# Altium PCB DS165-1.1-B铵根离子传感器.PcbDoc
Units mil, origin at the board's own origin, x right, y up, seen from the top; angles counter-clockwise.
Board outline 1614.17 x 2519.69 mil, 2 copper layers (Top Layer, Bottom Layer); 36 components, 39 nets, 118 pads, 82 vias.
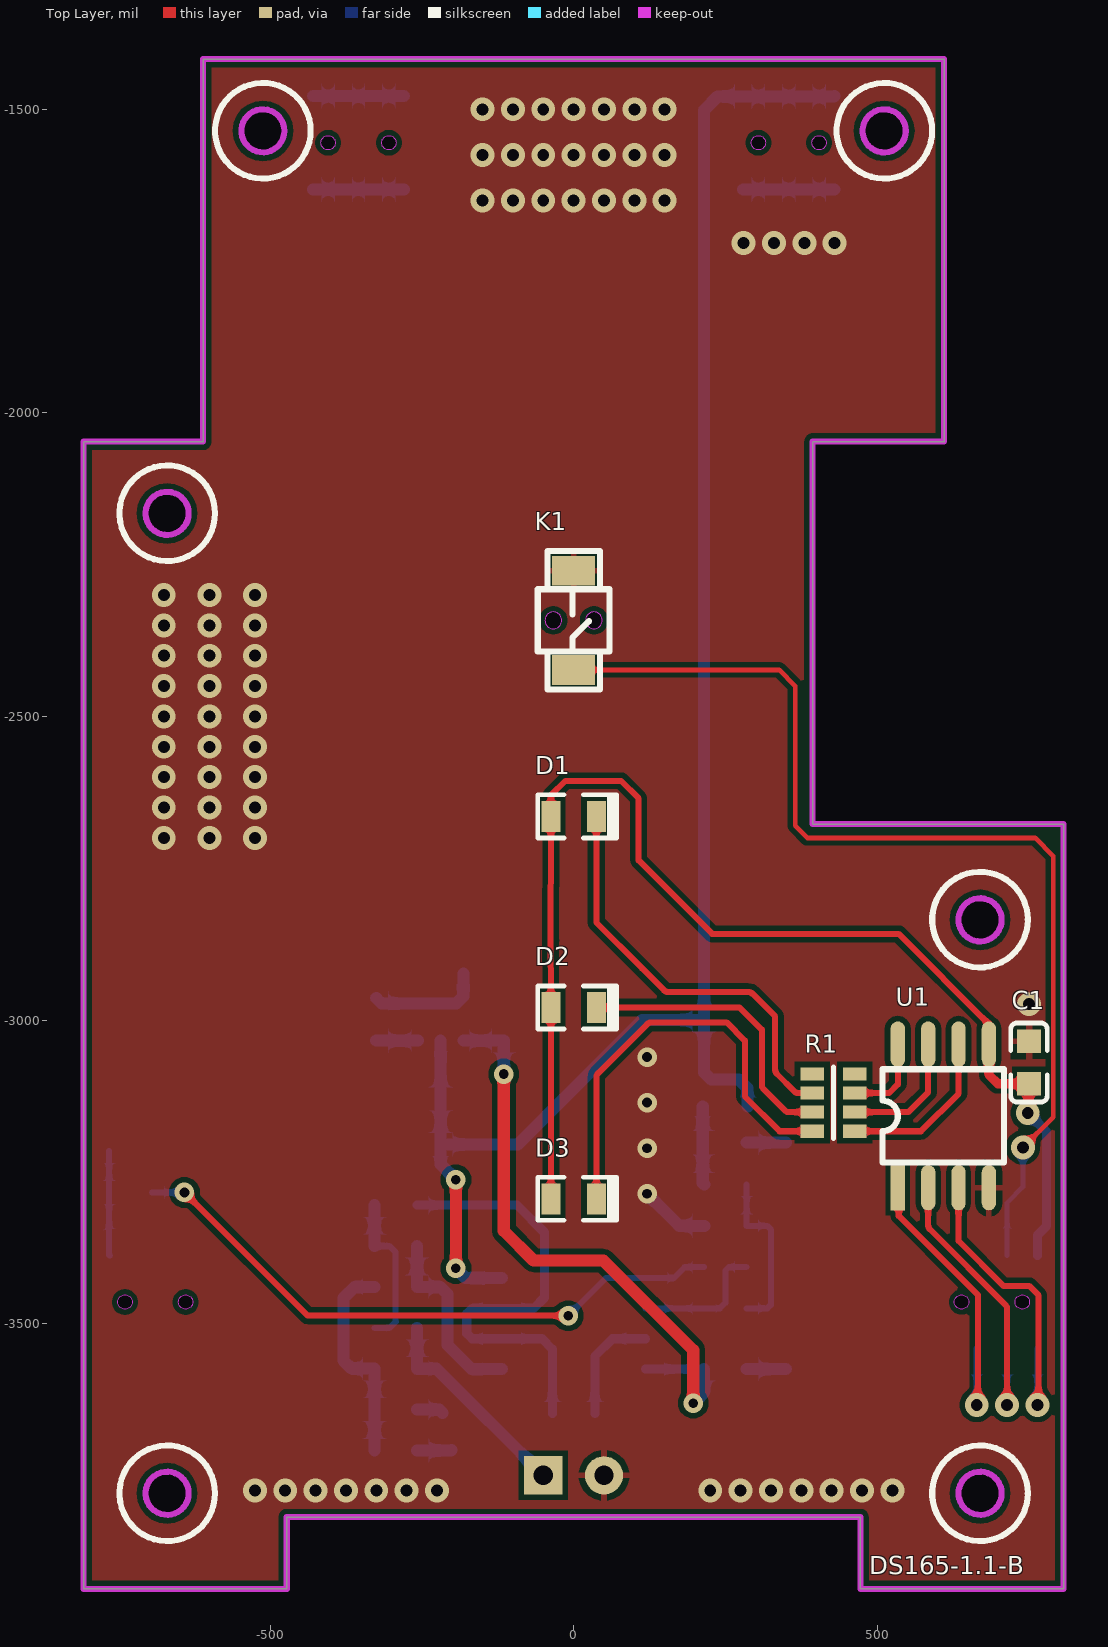
[diagram p0: Top Layer view]
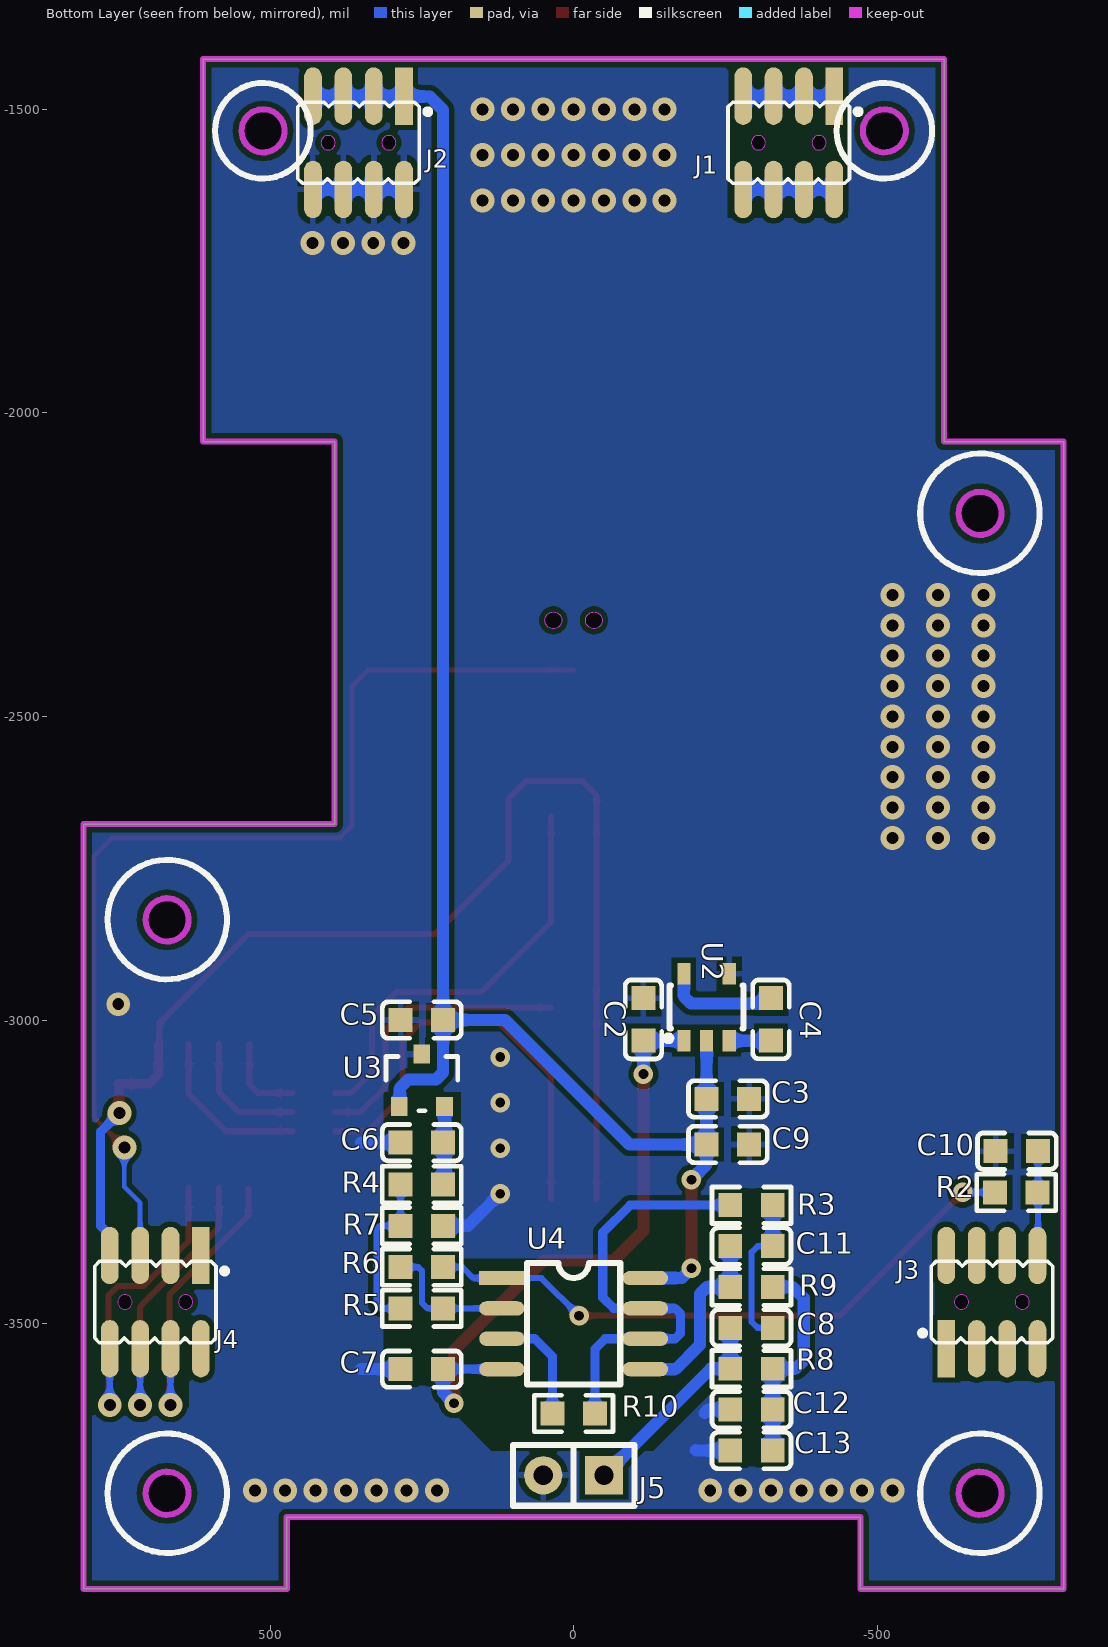
[diagram p1: Bottom Layer view, seen from below]
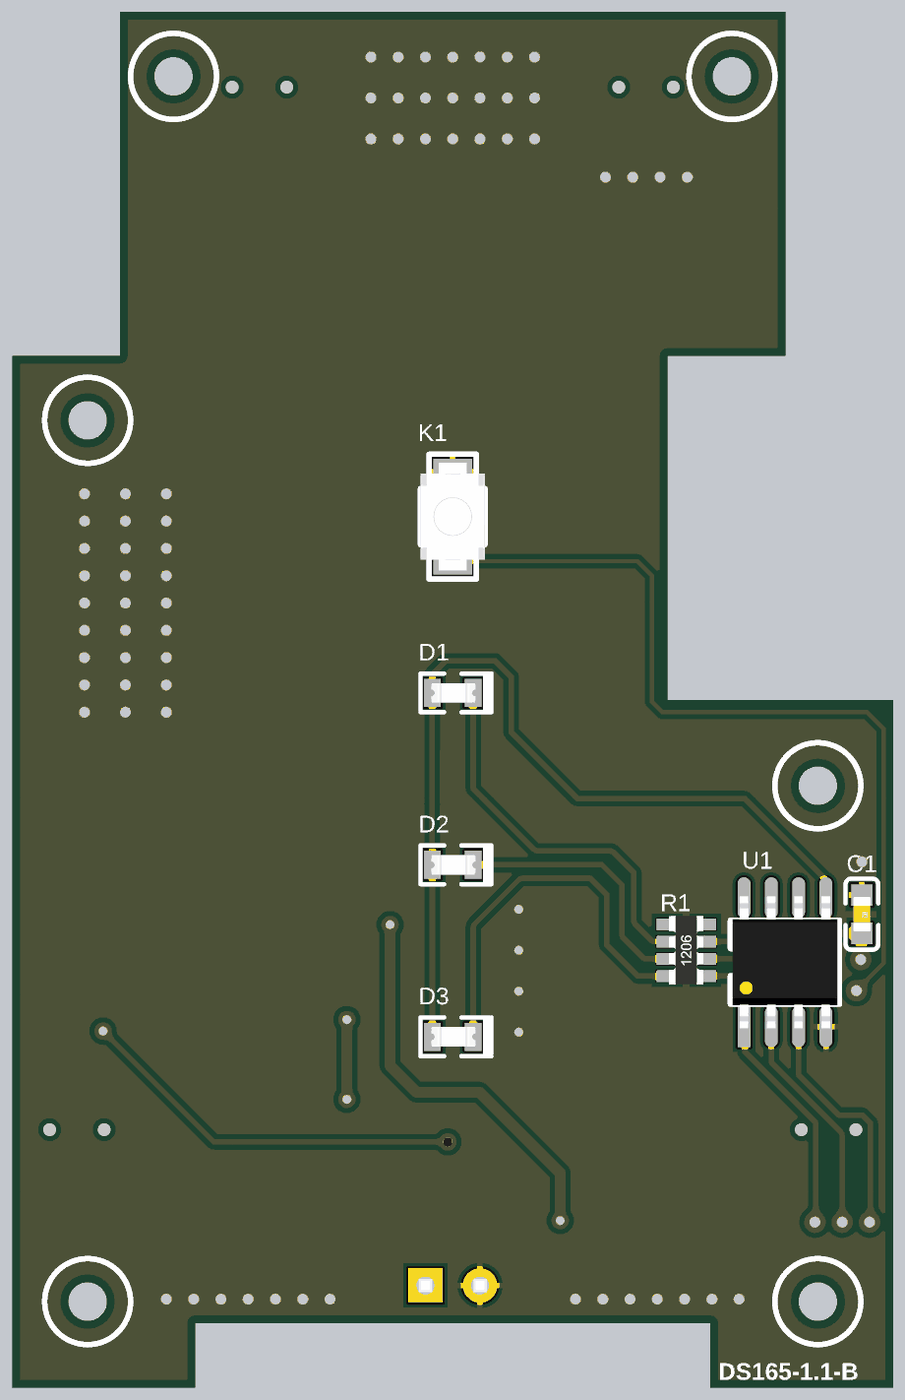
[diagram p2: 3D render of the assembled board from above, using the file's embedded part models]
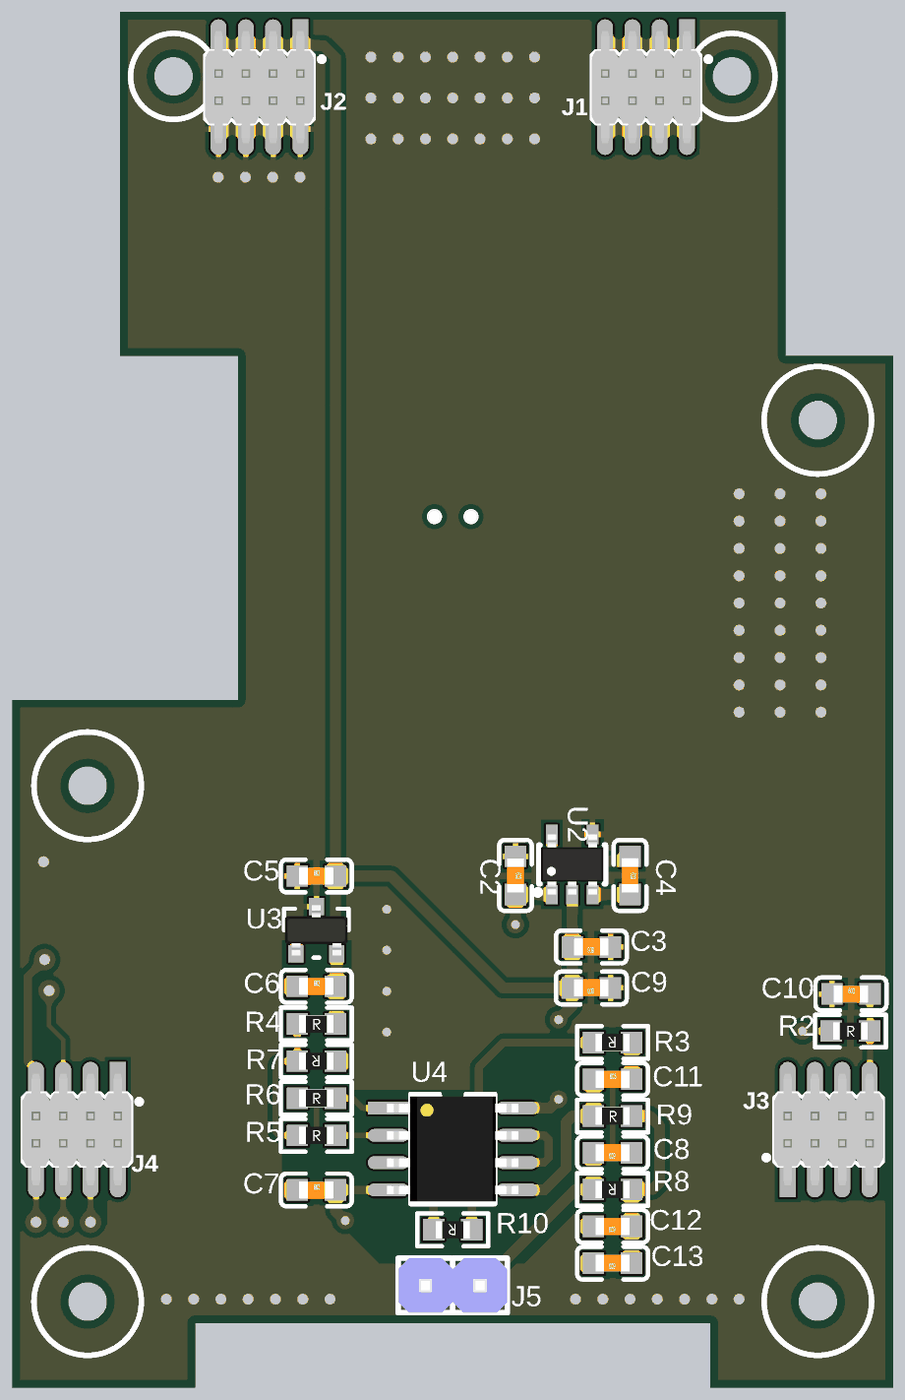
[diagram p3: 3D render of the assembled board from below, using the file's embedded part models]

## Layer stack, top to bottom
Top Solder: solder mask 0.4, Solder Resist, Dk 3.5
Top Layer: signal copper 1.4
Dielectric 1: dielectric 12.6, FR-4, Dk 4.8
Bottom Layer: signal copper 1.4
Bottom Solder: solder mask 0.4, Solder Resist, Dk 3.5

## Board outline
-807.09,-3937.01 -807.09,-2047.24 -610.24,-2047.24 -610.24,-1417.32 610.24,-1417.32 610.24,-2047.24 393.7,-2047.24 393.7,-2677.17 807.09,-2677.17 807.09,-3937.01 472.44,-3937.01 472.44,-3818.9 -472.44,-3818.9 -472.44,-3937.01
cut-out: -704.72,-3779.53 ccw(c-669.29,-3779.53) -669.29,-3814.96 ccw(c-669.29,-3779.53) -633.86,-3779.53 ccw(c-669.29,-3779.53) -669.29,-3744.09 ccw(c-669.29,-3779.53)
cut-out: 633.86,-3779.53 ccw(c669.29,-3779.53) 669.29,-3814.96 ccw(c669.29,-3779.53) 704.72,-3779.53 ccw(c669.29,-3779.53) 669.29,-3744.09 ccw(c669.29,-3779.53)
cut-out: 633.86,-2834.65 ccw(c669.29,-2834.65) 669.29,-2870.08 ccw(c669.29,-2834.65) 704.72,-2834.65 ccw(c669.29,-2834.65) 669.29,-2799.21 ccw(c669.29,-2834.65)
cut-out: -704.72,-2165.35 ccw(c-669.29,-2165.35) -669.29,-2200.79 ccw(c-669.29,-2165.35) -633.86,-2165.35 ccw(c-669.29,-2165.35) -669.29,-2129.92 ccw(c-669.29,-2165.35)
cut-out: 476.38,-1535.43 ccw(c511.81,-1535.43) 511.81,-1570.87 ccw(c511.81,-1535.43) 547.24,-1535.43 ccw(c511.81,-1535.43) 511.81,-1500 ccw(c511.81,-1535.43)
cut-out: -547.24,-1535.43 ccw(c-511.81,-1535.43) -511.81,-1570.87 ccw(c-511.81,-1535.43) -476.38,-1535.43 ccw(c-511.81,-1535.43) -511.81,-1500 ccw(c-511.81,-1535.43)
cut-out: -704.72,-3779.53 ccw(c-669.29,-3779.53) -669.29,-3814.96 ccw(c-669.29,-3779.53) -633.86,-3779.53 ccw(c-669.29,-3779.53) -669.29,-3744.09 ccw(c-669.29,-3779.53)
cut-out: 633.86,-3779.53 ccw(c669.29,-3779.53) 669.29,-3814.96 ccw(c669.29,-3779.53) 704.72,-3779.53 ccw(c669.29,-3779.53) 669.29,-3744.09 ccw(c669.29,-3779.53)
cut-out: 633.86,-2834.65 ccw(c669.29,-2834.65) 669.29,-2870.08 ccw(c669.29,-2834.65) 704.72,-2834.65 ccw(c669.29,-2834.65) 669.29,-2799.21 ccw(c669.29,-2834.65)
cut-out: -704.72,-2165.35 ccw(c-669.29,-2165.35) -669.29,-2200.79 ccw(c-669.29,-2165.35) -633.86,-2165.35 ccw(c-669.29,-2165.35) -669.29,-2129.92 ccw(c-669.29,-2165.35)
cut-out: 476.38,-1535.43 ccw(c511.81,-1535.43) 511.81,-1570.87 ccw(c511.81,-1535.43) 547.24,-1535.43 ccw(c511.81,-1535.43) 511.81,-1500 ccw(c511.81,-1535.43)
cut-out: -547.24,-1535.43 ccw(c-511.81,-1535.43) -511.81,-1570.87 ccw(c-511.81,-1535.43) -476.38,-1535.43 ccw(c-511.81,-1535.43) -511.81,-1500 ccw(c-511.81,-1535.43)

## Design rules (kind name [scope] priority, off if disabled: settings)
Clearance [All] p1: gap=6 ignorepadtopadclearanceinfootprint=TRUE except(9: Arc-Fill Arc-Poly Arc-Region Track-Fill Track-Poly Track-Region SMDPad-Fill SMDPad-Poly SMDPad-Region THPad-Fill THPad-Poly THPad-Region Via-Fill Via-Poly Via-Region Fill-Fill Fill-Poly Fill-Region Poly-Poly Poly-Region Region-Region)
PolygonConnect [All] p1: thpad.connectstyle=Relief thpad.reliefconductorwidth=10 thpad.reliefentries=4 thpad.polygonreliefangle="90 Angle" thpad.airgapwidth=10 smdpad.connectstyle=Relief smdpad.reliefconductorwidth=10 smdpad.reliefentries=4 smdpad.polygonreliefangle="90 Angle" smdpad.airgapwidth=10 via.connectstyle=Direct via.reliefconductorwidth=10 via.reliefentries=4 via.polygonreliefangle="90 Angle" via.airgapwidth=10
RoutingVias [All] p1: holewidth=16 width=32 viastyle="Through Hole" minholewidth=16 minwidth=32 maxholewidth=28 maxwidth=50
SolderMaskExpansion [All] p1: expansion=4 istentingtop=FALSE
Width [All] p1: maxlimit=20 minlimit=6 preferedwidth=10
30 further rules are at their usual default settings.

## Components (designator, comment, footprint, x,y, rotation, side; value= is the part's Value field where it differs from the comment)
C1 "SMDCAP00013" 0603CAP 750,-3070 r270 top value=100nF
C2 "MLCC 3.3uF 50V ±10％ 0603" 0603CAP -115,-2999 r270 bottom value=3.3uF
C3 "MLCC 3.3uF 50V ±10％ 0603" 0603CAP -254.04,-3130 r0 bottom value=3.3uF
C4 "MLCC 3.3uF 50V ±10％ 0603" 0603CAP -325,-2998.96 r270 bottom value=3.3uF
C5 "MLCC 100nF 50V ±10％ 0603" 0603CAP 250.04,-3000 r180 bottom value=100nF
C6 "MLCC 100nF 50V ±10％ 0603" 0603CAP 250.04,-3202 r180 bottom value=100nF
C7 "MLCC 100nF 50V ±10％ 0603" 0603CAP 250.04,-3575 r180 bottom value=100nF
C8 "MLCC 100nF 50V ±10％ 0603" 0603CAP -293,-3507 r0 bottom value=100nF
C9 "MLCC 100nF 50V ±10％ 0603" 0603CAP -254.04,-3205 r0 bottom value=100nF
C10 "MLCC 100nF 50V ±10％ 0603" 0603CAP -730,-3216 r180 bottom value=100nF
C11 "MLCC 100nF 50V ±10％ 0603" 0603CAP -293,-3372.33 r180 bottom value=100nF
C12 "MLCC 100nF 50V ±10％ 0603" 0603CAP -293,-3641.67 r0 bottom value=100nF
C13 "MLCC 100nF 50V ±10％ 0603" 0603CAP -293,-3709 r0 bottom value=100nF
D1 "SMDLED00010" LED_0805 0,-2664.57 r0 top value=BLUE
D2 "SMDLED00003" LED_0805 0,-2979.53 r0 top value=RED
D3 "Chip 翠绿LED 0805" LED_0805 0,-3294.49 r0 top value=GREEN
J1 "X1321WVS-2x04J-C40D53" X1321WVS-2X04J-C40D53 -354.33,-1555.12 r0 bottom locked value=2*4P
J2 "X1321WVS-2x04J-C40D53" X1321WVS-2X04J-C40D53 354.33,-1555.12 r0 bottom locked value=2*4P
J3 "X1321WVS-2x04J-C40D53" X1321WVS-2X04J-C40D53 -688.98,-3464.57 r180 bottom locked value=2*4P
J4 "X1321WVS-2x04J-C40D53" X1321WVS-2X04J-C40D53 688.98,-3464.57 r0 bottom locked value=2*4P
J5 "SL000000042" SIP2 0,-3750 r0 bottom value=探头
K1 "TS-1185-B-A-A-A" KEY_TS-1185-x-A-A-A 0,-2341.73 r270 top
R1 "SMDRES05003" 0603RES_Pack4 428,-3136 r180 top value=510R
R2 "SMDRES00015" 0603RES -729,-3284 r180 bottom value=100R
R3 "Chip 16K 1/16W ±1％ 0603" 0603RES -293,-3305 r0 bottom value=16K
R4 "Chip 1K 1/10W ±0.1％ 0603" 0603RES 250.04,-3271 r180 bottom value="1K ±0.1%"
R5 "Chip 10K 1/10W ±0.1％ 0603" 0603RES 250.04,-3475 r180 bottom value="10K ±0.1%"
R6 "Chip 50K 1/10W ±0.1％ 0603" 0603RES 250.04,-3407 r180 bottom value="50K ±0.1%"
R7 "SMDRES00015" 0603RES 250.04,-3339 r0 bottom value=100R
R8 "Chip 16K 1/16W ±1％ 0603" 0603RES -293,-3574.33 r0 bottom value=16K
R9 "Chip 16K 1/16W ±1％ 0603" 0603RES -293,-3439.67 r180 bottom value=16K
R10 "Chip 10K 1/10W ±0.1％ 0603" 0603RES 0,-3648 r0 bottom value="10K ±0.1%"
U1 "SMDIC000018" SO-8 609,-3157.89 r90 top value=ULN2001
U2 "SGM3206" SOT23-5 -219,-2978.88 r180 bottom value=丝印SL7NL
U3 "REF3025" SOT23 250,-3099.31 r180 bottom value=丝印R30C
U4 "OPA2188" SO-8 0,-3500 r180 bottom

## Footprints (in the part's own frame and the unit in brackets; to place one, negate y for a bottom-side part, rotate by r counter-clockwise, add the part's x,y. Pads: shape width x height; smd on the part's side, far side on the other; paste and mask are expansions set on the pad)
0603CAP [mm]
  rect 1x1 smd: 1(-0.889,0) 2(0.89,0)
  silkscreen extent -1.65,-0.76 1.65,0.76, body extent -0.8,-0.4 0.8,0.4, height 0.3
0603RES [mm]
  rect 1x1 smd: 1(-0.889,0) 2(0.889,0)
  silkscreen extent -1.65,-0.76 1.65,0.76, body extent -0.8,-0.41 0.8,0.41, height 0.51
0603RES_Pack4 [mm]
  rect 1x0.55 smd mask+0.05: 1(-0.889,1.2) 2(-0.889,0.4) 3(-0.889,-0.4) 4(-0.889,-1.2) 5(0.889,-1.2) 6(0.889,-0.4) 7(0.889,0.4) 8(0.889,1.2)
  silkscreen extent 0,-1.5 0,1.5, body extent -0.8,-1.6 0.8,1.6, height 0.5
KEY_TS-1185-x-A-A-A [mm]
  rect 1.25x1.8 smd: 1(-2.075,0) 2(2.075,0)
  Keep-Out Layer board cut-out: 0.35,-0.85 0.323,-0.716 0.247,-0.603 0.134,-0.527 0,-0.5 0,-0.5 -0.134,-0.527 -0.247,-0.603 -0.323,-0.716 -0.35,-0.85 -0.35,-0.85 -0.323,-0.984 -0.247,-1.097 -0.134,-1.173 0,-1.2 0,-1.2 0.134,-1.173 0.247,-1.097 0.323,-0.984 0.35,-0.85
  Keep-Out Layer board cut-out: -0.35,0.85 -0.323,0.716 -0.247,0.603 -0.134,0.527 0,0.5 0,0.5 0.134,0.527 0.247,0.603 0.323,0.716 0.35,0.85 0.35,0.85 0.323,0.984 0.247,1.097 0.134,1.173 0,1.2 0,1.2 -0.134,1.173 -0.247,1.097 -0.323,0.984 -0.35,0.85
  silkscreen extent -2.9,-1.5 2.9,1.5, body extent -2.5,-1.5 2.5,1.5, height 2
LED_0805 [mm]
  rect 0.8x1.3 smd: 1(-0.95,0) 2(0.95,0)
  silkscreen extent -1.5,-0.9 1.8,0.9, body extent -1,-0.45 1.06,0.45, height 0.85
SIP2 [mm]
  rect 1.6x1.6 hole 0.813: 1(-1.27,0)
  round 1.6 hole 0.813: 2(1.27,0)
  silkscreen extent -2.54,-1.27 2.54,1.27, body extent -2.54,-1.27 2.54,1.27, height 8.64
SO-8 [mm]
  rect 1.9x0.6 smd: 1(-3,1.905)
  oval 1.9x0.6 smd: 2(-3,0.635) 3(-3,-0.635) 4(-3,-1.905) 5(3,-1.905) 6(3,-0.635) 7(3,0.635) 8(3,1.905)
  silkscreen extent -1.95,-2.54 1.95,2.54, body extent -3.07,-2.44 3.07,2.44, height 1.77
SOT23 [mm]
  rect 0.7x0.8 smd: 1(-0.95,-1.1) 2(0.95,-1.1) 3(0,1.1)
  silkscreen extent -1.5,-1.27 1.5,1, body extent -1.46,-1.17 1.46,1.17, height 1
SOT23-5 [mm] "SOT-23/SC-74A; 5 Leads; Body 3.1 x 3 mm, inc. leads (LxW max)"
  rect 0.55x0.9 smd: 1(-0.95,-1.4) 2(0,-1.4) 3(0.95,-1.4) 4(0.95,1.4) 5(-0.95,1.4)
  silkscreen extent -1.7,-1.4 1.55,0.9, body extent -1.45,-1.4 1.45,1.4, height 1.45
X1321WVS-2X04J-C40D53 [mm]
  rect 0.74x2.4 smd: 1(-1.905,-1.95)
  oval 0.74x2.4 smd: 2(-1.905,1.95) 3(-0.635,-1.95) 4(-0.635,1.95) 5(0.635,-1.95) 6(0.635,1.95) 7(1.905,-1.95) 8(1.905,1.95)
  Keep-Out Layer board cut-out: -1.57,0 -1.547,-0.115 -1.482,-0.212 -1.385,-0.277 -1.27,-0.3 -1.27,-0.3 -1.155,-0.277 -1.058,-0.212 -0.993,-0.115 -0.97,0 -0.97,0 -0.993,0.115 -1.058,0.212 -1.155,0.277 -1.27,0.3 -1.27,0.3 -1.385,0.277 -1.482,0.212 -1.547,0.115 -1.57,0
  Keep-Out Layer board cut-out: 1.57,0 1.547,0.115 1.482,0.212 1.385,0.277 1.27,0.3 1.27,0.3 1.155,0.277 1.058,0.212 0.993,0.115 0.97,0 0.97,0 0.993,-0.115 1.058,-0.212 1.155,-0.277 1.27,-0.3 1.27,-0.3 1.385,-0.277 1.482,-0.212 1.547,-0.115 1.57,0
  silkscreen extent -3,-1.7 2.54,1.7, body extent -2.54,-2.6 2.54,2.6, height 5.5

## Part data
C1: library part "MLCC 100nF 50V ±10％ 0603", "贴片电容"
C2 C3 C4 C5 C6 C7 C8 C9 C10 C11 C12 C13: "贴片电容"
D1: library part "Chip 蓝色LED 0805", "贴片LED"
D2: library part "Chip 红色LED 0805", "贴片LED"
D3: "贴片LED"
J1 J2 J3 J4: "双排针2x4P 立贴 1.27mm"
J5: library part "DIP2 单排直针 1*40P 间距2.54mm 针长11mm 铜", "单排直针"
K1: "轻触开关"
R1: library part "Chip R*4 510R 1/16W ±5％ 0603", "贴片排阻"
R2 R7: library part "Chip 100R 1/16W ±1％ 0603", "贴片电阻"
R3 R8 R9: "贴片电阻"
U1: library part "ULN2001 SOP-8", "电机驱动芯片"
U2: "SGMICRO(圣邦微) / SGM3206YN5G/TR / SOT-23-5"
U3: "TI / REF3025AIDBZR / SOT-23"
U4: "精密运放"

## Via types
v1: diameter 39.37, hole 19.68, Top Layer to Bottom Layer, tented both sides, 72 vias
v2: diameter 32, hole 16, Top Layer to Bottom Layer, tented both sides, 10 vias

## Nets (pads, with @x,y where several pads share a name; then routed paths per layer and width w, separated by ;. In a path a pad name is that pad's centre, name@x,y a point inside that pad or via, vN(x,y) a via of type N, cw(c..) or ccw(c..) an arc to the next point about the centre after c; other vN are vias at no path point)
ADC0: C10.2 J3.8 R2.2 | length 172.2
  Bottom Layer w10: C10.2 -765.04,-3386.73 J3.8
ADC1: J4.2
DAC_OUT: J3.6
Dis_blue_EN: J4.4 U1.1 | length 503.8
  Top Layer w10: U1.1@535.54,-3277.54 535.54,-3322.54 665.79,-3452.79 665.79,-3632.17 v1(663.98,-3633.98)
  Bottom Layer w10: v1(663.98,-3633.98) J4.4
Dis_green_EN: J4.8 U1.3 | length 530.7
  Top Layer w10: U1.3 634,-3364 707.76,-3437.76 750.08,-3437.76 765.79,-3453.46 765.79,-3632.17 v1(763.98,-3633.98)
  Bottom Layer w10: v1(763.98,-3633.98) J4.8
Dis_red_EN: J4.6 U1.2 | length 503.6
  Top Layer w10: U1.2 584,-3337.86 ccw(c594,-3337.86) 586.93,-3344.93 711.05,-3469.05 cw(c703.98,-3476.12) 713.98,-3476.12 v1(713.98,-3633.98)
  Bottom Layer w10: v1(713.98,-3633.98) J4.6
GND: C1.1 C2.1 C3.1 C5.1 C6.1 C7.1 C9.1 C10.1 C12.2 C13.2 J2.2 J2.4 J2.6 J2.8 J5.2 K1.1 R7.1 U1.4 U2.4 U3.3 | length 497.5
  Bottom Layer w20: C13.2 -202,-3709 -201,-3708 ; C12.2 -221.33,-3641.67 -216,-3647 ; v2(121,-3286) 174,-3339 R7.1 ; J2.2 J2.4 J2.6 J2.8 ; C7.1 350,-3575 ; C6.1 350,-3202
  other v1: -525,-3775 -475,-3775 -425,-3775 -375,-3775 -325,-3775 -275,-3775 -225,-3775 225,-3775 275,-3775 325,-3775 375,-3775 425,-3775 475,-3775 525,-3775 750,-2974 -675,-2700 -600,-2700 -525,-2700 -675,-2650 -600,-2650 -525,-2650 -675,-2600 -600,-2600 -525,-2600 -675,-2550 -600,-2550 -525,-2550 -675,-2500 -600,-2500 -525,-2500 -675,-2450 -600,-2450 -525,-2450 -675,-2400 -600,-2400 -525,-2400 -675,-2350 -600,-2350 -525,-2350 -675,-2300 -600,-2300 -525,-2300 280,-1720 330,-1720 380,-1720 430,-1720 -150,-1650 -100,-1650 -50,-1650 0,-1650 50,-1650 100,-1650 150,-1650 -150,-1575 -100,-1575 -50,-1575 0,-1575 50,-1575 100,-1575 150,-1575 -150,-1500 -100,-1500 -50,-1500 0,-1500 50,-1500 100,-1500 150,-1500
  other v2: 121,-3211 121,-3136 121,-3061
I2C1_SCL: J4.1
I2C1_SDA: J4.3
KEY_HOME: J4.5 K1.2 | length 1741
  Top Layer w7.87: K1.2 338.43,-2423.43 365,-2450 365,-2680 385,-2700 760,-2700 790,-2730 790,-3160 v1(740,-3210)
  Bottom Layer w7.87: J4.5 713.98,-3301.02 740,-3275 v1(740,-3210)
LED_blue: D1.2 R1.6 | length 698.9
  Top Layer w10: D1.2 37.4,-2839.4 113,-2915 149.07,-2951.07 ccw(c156.14,-2944) 156.14,-2954 287.86,-2954 cw(c287.86,-2964) 294.93,-2956.93 332,-2994 332,-3081.86 ccw(c342,-3081.86) 334.93,-3088.93 363.36,-3117.36 ccw(c370.39,-3110.25) 370.35,-3120.25 R1.6
LED_green: D3.2 R1.8 | length 722.6
  Top Layer w10: D3.2 37.4,-3094.7 cw(c47.4,-3094.74) 40.3,-3087.7 121.09,-3006.91 cw(c128.14,-3014) 128.14,-3004 252,-3004 282,-3034 282,-3126 339.24,-3183.24 R1.8
LED_red: D2.2 R1.7 | length 481.7
  Top Layer w10: D2.2 273.53,-2979.53 310,-3016 310,-3106.86 ccw(c320,-3106.86) 312.93,-3113.93 347.85,-3148.85 ccw(c354.89,-3141.75) 354.85,-3151.75 R1.7
NetC4_1: C4.1 U2.5 | length 189.5
  Bottom Layer w20: C4.1 -315.96,-2973 -193.31,-2973 -181.6,-2961.28 U2.5
NetC4_2: C4.2 U2.3 | length 68.6
  Bottom Layer w20: C4.2 U2.3
NetC8_1: C8.1 C11.2 R3.1 | length 260.3
  Bottom Layer w10: C11.2 -303.04,-3372.33 -293.04,-3382.33 -293.04,-3496.96 -293,-3497 -303,-3507 C8.1
  Bottom Layer w20: C11.2 -328,-3372.29 R3.1
NetC8_2: C8.2 J5.1 R8.2 | length 348.1
  Bottom Layer w20: C8.2 C8.2 R8.2 -225.67,-3574.33 J5.1
NetC11_1: C11.1 R9.1 U4.5 | length 312.3
  Bottom Layer w20: C11.1 R9.1 -219.72,-3439.67 -208,-3451.38 -208,-3535 -168,-3575 U4.5
NetC12_1: C12.1 C13.1 R8.1 R9.2 | length 352.8
  Bottom Layer w20: C13.1 C12.1 R8.1 -328.3,-3574.03 -365.97,-3574.03 -379,-3561 -379,-3458 -360.67,-3439.67 R9.2
NetR1_1: R1.1 U1.6 | length 278.1
  Top Layer w10: R1.1 572,-3183.24 634,-3121.24 U1.6
NetR1_2: R1.2 U1.7 | length 213.8
  Top Layer w10: R1.2 551.25,-3151.75 584,-3119 U1.7
NetR1_3: R1.3 U1.8 | length 143.1
  Top Layer w10: R1.3 519.75,-3120.25 534,-3106 U1.8
NetR2_1: R2.1 R6.2 U4.1 | length 1024.4
  Top Layer w10: v2(-641,-3284) -438,-3487 v2(-9,-3487)
  Bottom Layer w10: R2.1 v2(-641,-3284) ; v2(-9,-3487) 53,-3425 U4.1 ; U4.1@120,-3425 165,-3425 183,-3407 R6.2
NetR3_2: R3.2 R10.1 U4.6 U4.7 | length 764.8
  Bottom Layer w15: R3.2 -93,-3305 -48,-3350 -48,-3457 -66,-3475 -167.21,-3475 -176,-3483.79 -176,-3516.21 -167.21,-3525 U4.6 -52,-3525 -35,-3542 R10.1
NetR5_2: R5.2 R6.1 U4.2 | length 226.1
  Bottom Layer w10: U4.2 R5.2 240.84,-3475 250,-3465.84 250,-3412.86 255.86,-3407 R6.1
NetR10_2: R10.2 U4.3 | length 189.1
  Bottom Layer w15: R10.2 35,-3554 64,-3525 U4.3
SPI2_CS: J3.4
SPI2_MISO: J3.1
SPI2_MOSI: J3.3
SPI2_SCK: J3.2
USART2_RXD: J3.5
USART2_TXD: J3.7
V_offset: R4.1 R5.1 R7.2 | length 277.1
  Bottom Layer w10: R5.1 319.14,-3475 325,-3469.14 325,-3344.86 319.14,-3339 R7.2 R4.1
VBUS: J1.2 J1.4 J1.6 J1.8 | length 150
  Bottom Layer w20: J1.2 J1.4 J1.6 J1.8
VCC_3V3_MCU: C1.2 D1.1 D2.1 D3.1 J4.7 U1.5 | length 2079.6
  Top Layer w10: -38,-2868.04 -37.51,-2958.94 D2.1 D3.1 ; -38,-2868 -37.46,-2685.16 D1.1 -37.4,-2630 -13.4,-2606 78,-2606 107,-2635 107,-2737 228.18,-2858.18 535.18,-2858.18 682.35,-3005.35 U1.5@682.35,-3038.13
  Top Layer w15: U1.5@682.35,-3038.13 U1.5 684,-3090 699.04,-3105.04 C1.2 749,-3106.04 749,-3152 v1(748,-3153)
  Bottom Layer w15: v1(748,-3153) 779,-3184 779,-3339.26 763.98,-3354.29 J4.7
VCC_5V: C3.2 C5.2 C9.2 J2.1 J2.3 J2.5 J2.7 U2.2 U3.1 U4.8 | length 2908.8
  Top Layer w20: v2(-194,-3409) v2(-194,-3263)
  Bottom Layer w20: U2.2 C3.2 C9.2 ; v2(-194,-3409) -178,-3425 U4.8 ; v2(-194,-3263) -219,-3238 C9.2 ; U3.1 286.19,-3141.4 286.19,-3111.87 272.32,-3098 226.72,-3098 215,-3086.28 C5.2 ; J2.7 428.68,-1479 237,-1479 215,-1501 C5.2 ; C9.2 -92,-3205 113,-3000 C5.2
VCC_-5V: C2.2 C7.2 U2.1 U4.4 | length 1020.5
  Top Layer w20: v2(-115,-3089) -115,-3347 -66,-3396 49,-3396 197,-3544 v2(197,-3631)
  Bottom Layer w15: C2.2@-115.04,-3034 C2.2 ; U4.4 C7.2
  Bottom Layer w20: U2.1 C2.2@-115.04,-3034 ; v2(-115,-3089) C2.2 ; v2(197,-3631) 215,-3613 C7.2
Vref_2V5: C6.2 R4.2 U3.2 | length 129.4
  Bottom Layer w20: U3.2 212.6,-3268.56 R4.2
VSS: J1.1 J1.3 J1.5 J1.7 | length 150
  Bottom Layer w20: J1.1 J1.3 J1.5 J1.7
pads on no net: R1.4 R1.5

## Polygon pours and split planes (outlines as drawn)
GND on Top Layer "GND_L01_P001" (solid, remove dead copper, pour order 1): -807.09,-3937.01 -807.09,-2047.24 -610.24,-2047.24 -610.24,-1417.32 610.24,-1417.32 610.24,-2047.24 393.7,-2047.24 393.7,-2677.17 807.09,-2677.17 807.09,-3937.01 472.44,-3937.01 472.44,-3818.9 -472.44,-3818.9 -472.44,-3937.01
GND on Bottom Layer "GND_L02_P002" (solid, remove dead copper, pour order 2): -807.09,-3937.01 -807.09,-2047.24 -610.24,-2047.24 -610.24,-1417.32 610.24,-1417.32 610.24,-2047.24 393.7,-2047.24 393.7,-2677.17 807.09,-2677.17 807.09,-3937.01 472.44,-3937.01 472.44,-3818.9 -472.44,-3818.9 -472.44,-3937.01

## Keep-outs
Keep-Out Layer:
  circle w10: c-511.81,-1535.43 r35.43
  circle w10: c-511.81,-1535.43 r35.43
  circle w10: c-669.5,-3779.5 r35.53
  circle w10: c669.5,-3779.5 r35.53
  circle w10: c511.5,-1535.5 r35.53
  circle w10: c669.5,-2835 r35.53
  circle w10: c-669.5,-2165.5 r35.53
  lines w10: -807.09,-3937.01 -472.44,-3937.01 -472.44,-3818.9 472.44,-3818.9 472.44,-3937.01 807.09,-3937.01 807.09,-2677.17 393.7,-2677.17 393.7,-2047.24 610.24,-2047.24 610.24,-1417.32 -610.24,-1417.32 -610.24,-2047.24 -807.09,-2047.24 -807.09,-3937.01

## Other copper
Bottom Layer:
  pour cut-out: -357.68,-3736 -229.32,-3736 -229.32,-3277 -357.68,-3277
  pour cut-out: 185.35,-3602 313.72,-3602 313.72,-3117.87 185.35,-3117.87
  pour cut-out: 235.5,-3392 -231.5,-3392 -231.5,-3610 -131.5,-3710 135.5,-3710 235.5,-3610
  pour cut-out: -254.6,-1432.26 -451.99,-1432.26 -451.99,-1678.16 -450.41,-1679.74 -253.4,-1679.74
  pour cut-out: 633.35,-3358.35 633.35,-3339 659.21,-3339 788,-3339 788,-3645.83 641.98,-3645.83 633.35,-3637.2
  pour cut-out: -594.6,-3347.09 -595.51,-3348 -792,-3348 -792,-3593 -790.42,-3594.58 -593.41,-3594.58

## Silkscreen, mask and mechanical layers (free items; w line width, h text height)
Top Overlay:
  circle w10: c-669.29,-3779.53 r78.74
  circle w10: c669.29,-3779.53 r78.74
  circle w10: c669.29,-2834.65 r78.74
  circle w10: c-669.29,-2165.35 r78.74
  circle w10: c-511.81,-1535.43 r78.74
  circle w10: c511.81,-1535.43 r78.74
  text "DS165-1.1-B" at 486.72,-3922.73 h50
Bottom Overlay:
  circle w10: c-669.29,-3779.53 r98.43
  circle w10: c669.29,-3779.53 r98.43
  circle w10: c669.29,-2834.65 r98.43
  circle w10: c-669.29,-2165.35 r98.43
  circle w10: c-511.81,-1535.43 r78.74
  circle w10: c511.81,-1535.43 r78.74
Mechanical 1:
  circle w10: c-511.81,-1535.43 r35.43
  circle w10: c669.29,-2834.65 r35.43
  circle w10: c-511.81,-1535.43 r35.43
  circle w10: c511.81,-1535.43 r35.43
  circle w10: c-669.29,-2165.35 r35.43
  circle w10: c669.29,-3779.53 r35.43
  circle w10: c-669.29,-3779.53 r35.43
  lines w10: -807.09,-3937.01 -472.44,-3937.01 -472.44,-3818.9 472.44,-3818.9 472.44,-3937.01 807.09,-3937.01 807.09,-2677.17 393.7,-2677.17 393.7,-2047.24 610.24,-2047.24 610.24,-1417.32 -610.24,-1417.32 -610.24,-2047.24 -807.09,-2047.24 -807.09,-3937.01
Mechanical 15:
  lines w5.91: -176.57,-1417.32 -176.57,-1748.43 176.57,-1748.43 176.57,-1417.32
  lines w20: -629.92,-2007.87 629.92,-2007.87